# Altium PCB PCB1.PcbDoc
Units mm, origin at the board's own origin, x right, y up, seen from the top; angles counter-clockwise.
Board outline 150 x 80 mm, 2 copper layers (Top Layer, Bottom Layer); 32 components, 18 nets, 102 pads, 0 vias.
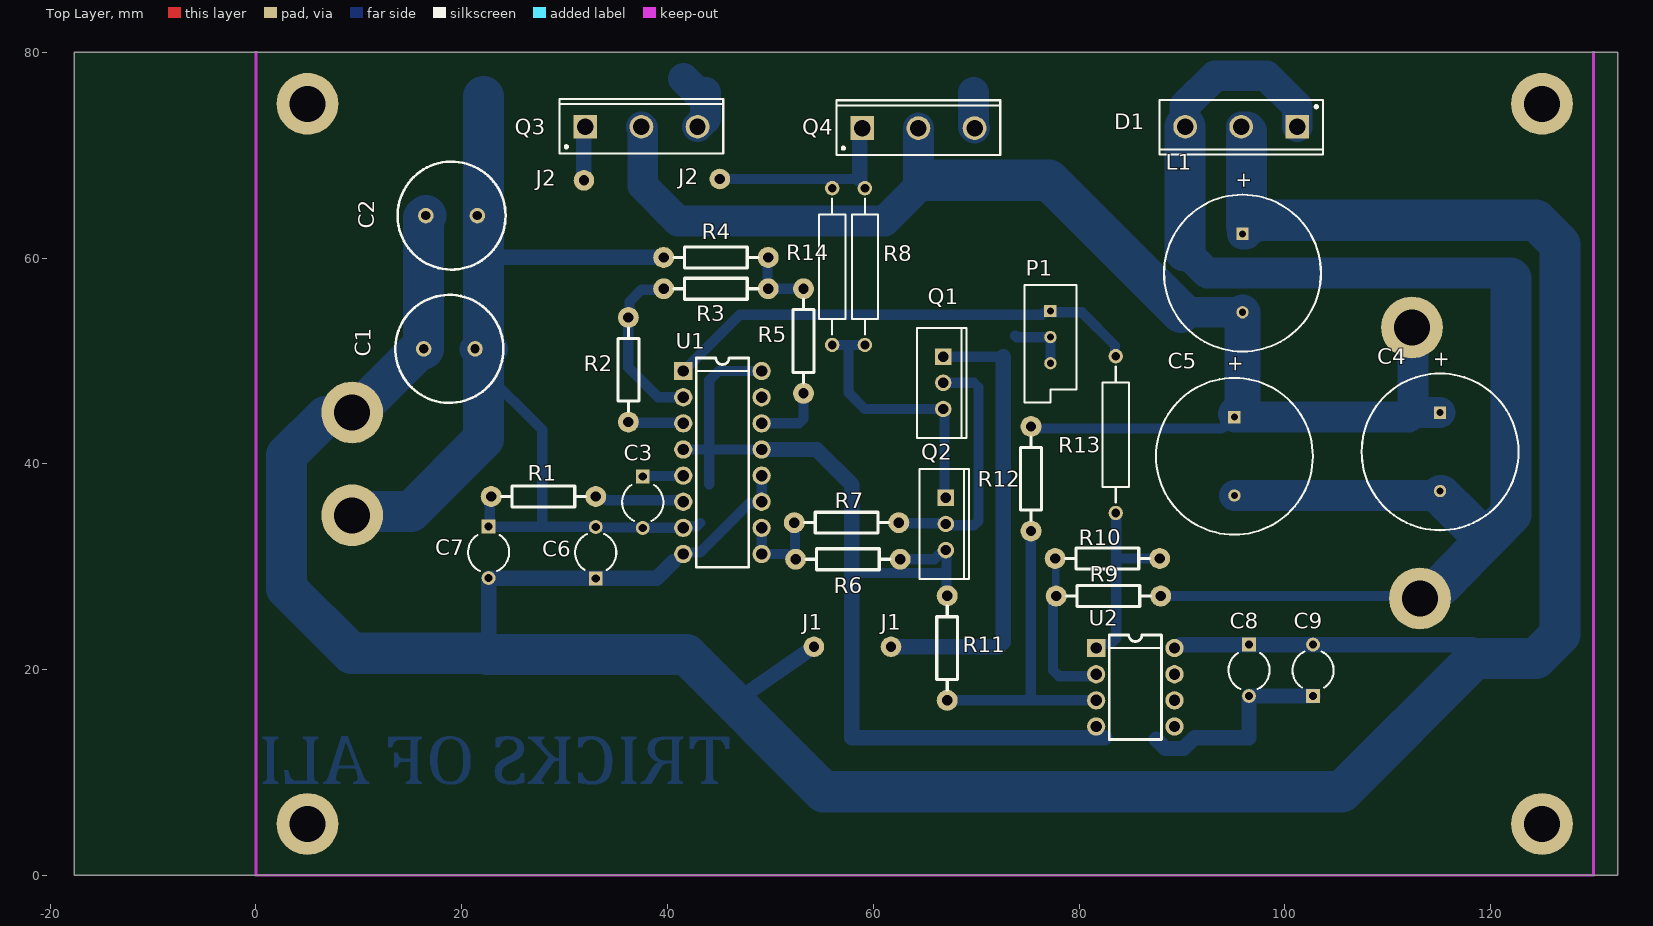
[diagram p0: Top Layer view]
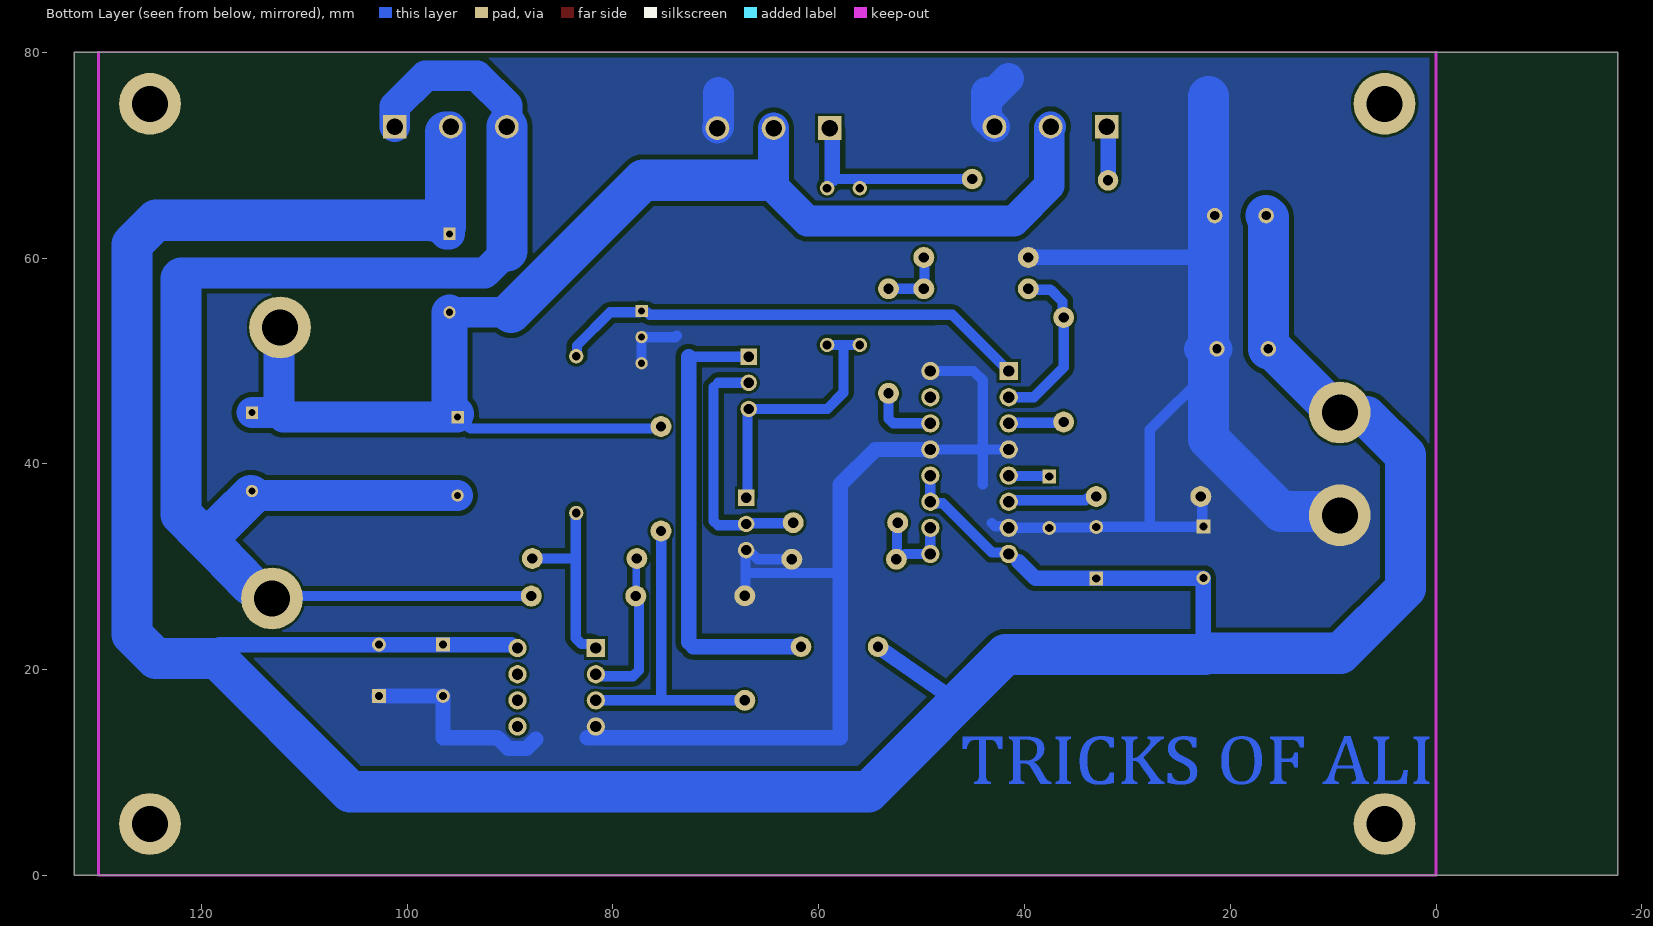
[diagram p1: Bottom Layer view, seen from below]

## Layer stack, top to bottom
Top Solder: solder mask 0.0102, Solder Resist, Dk 3.5
Top Layer: signal copper 0.0356
Dielectric 1: dielectric 0.32, FR-4, Dk 4.8
Bottom Layer: signal copper 0.0356
Bottom Solder: solder mask 0.0102, Solder Resist, Dk 3.5

## Board outline
-17.653,0 132.347,0 132.347,80 -17.653,80

## Design rules (kind name [scope] priority, off if disabled: settings)
Clearance [All] p1: gap=0.254 ignorepadtopadclearanceinfootprint=FALSE except(0: SMDPad-Hole THPad-Hole Via-Hole Fill-Hole Poly-Hole Region-Hole Text-Hole; 0.5: Arc-Arc Arc-Track Arc-SMDPad Arc-THPad Arc-Via Arc-Fill Arc-Poly Arc-Region Arc-Hole Track-Track Track-SMDPad Track-THPad Track-Via Track-Fill Track-Poly Track-Region Track-Hole; 1: Fill-GluePoints Poly-GluePoints Region-GluePoints)
DiffPairsRouting [All] p1: maxlimit=1 minlimit=0.5 mostfreqgap=0.5 toplayer_minwidth=0.25 toplayer_maxwidth=1 toplayer_prefwidth=0.5 bottomlayer_minwidth=0.25 bottomlayer_maxwidth=1 bottomlayer_prefwidth=0.5 maxuncoupledlength=12.7
PolygonConnect [All] p1: connectstyle=Direct reliefconductorwidth=0.254 reliefentries=4 polygonreliefangle="90 Angle" airgapwidth=0.5
RoomDefinition Sheet1 [InComponentClass('Sheet1')] p1: confinementstyle=ConfineOut formatcopy=TRUE lockcomponents=FALSE outline 324.993,126.365 330.073,126.365 330.073,129.286 324.993,129.286
RoutingLayers [All] p1: top layer_v5=FALSE bottom layer_v5=TRUE
RoutingPriority [InNetClass('power')] p1: routingpriority=100
RoutingVias [All] p1: holewidth=0.711 width=1.27 viastyle="Through Hole" minholewidth=0.711 minwidth=1.27 maxholewidth=0.711 maxwidth=1.27
SolderMaskExpansion [All] p1: expansion=0.102 istentingtop=FALSE
Width power [InNetClass('power')] p1: maxlimit=5 minlimit=0.75 preferedwidth=3
Width [All] p2: maxlimit=5 minlimit=0.75 preferedwidth=1
27 further rules are at their usual default settings.

## Components (designator, comment, footprint, x,y, rotation, side; value= is the part's Value field where it differs from the comment)
C1 "4700uF 16v" RB5-10.5 18.796,51.181 r0 top
C2 "4700uF 16v" RB5-10.5 19.01,64.135 r0 top
C3 "2.2nF" CAPR5-4X5 37.592,36.282 r270 top
C4 "4700uF 50V" RB7.6-15 115.087,41.173 r90 top
C5 "4700uF50v" RB7.6-15 95.098,40.742 r90 top
C6 "47uF" CAPR5-4X5 33.02,31.369 r90 top
C7 "100nF" CAPR5-4X5 22.606,31.409 r270 top
C8 "10uF" CAPR5-4X5 96.52,19.939 r270 top
C9 "100nF" CAPR5-4X5 102.743,19.939 r90 top
D1 "S30D45C" TO-247 95.758,72.771 r180 top
L1 "220uH" RB7.6-15 95.885,58.547 r90 top
P1 "10k" VR5 77.216,52.324 r270 top
Q1 "BD139" TO-220-AB 66.802,47.879 r270 top
Q2 "BD140" TO-220-AB 67.056,34.163 r270 top
Q3 "IRFP250" TO-247 37.465,72.771 r0 top
Q4 "IRFP250" TO-247 64.389,72.644 r0 top
R1 "4.7k" AXIAL0.4 33.02,36.83 r180 top
R2 "50K" AXIAL0.4 36.195,54.229 r270 top
R3 "560" AXIAL0.4 49.784,57.023 r180 top
R4 "10k" AXIAL0.4 49.784,60.071 r180 top
R5 "10k" AXIAL0.4 53.213,57.023 r270 top
R6 "2.2k" AXIAL0.4 52.451,30.734 r0 top
R7 "10" AXIAL0.4 52.324,34.29 r0 top
R8 "56 OHM 1W" AXIAL-0.6 59.182,59.182 r90 top
R9 "10k" AXIAL0.4 87.935,27.153 r180 top
R10 "2.2k" AXIAL0.4 77.673,30.81 r0 top
R11 "2.2k" AXIAL0.4 67.183,17.018 r90 top
R12 "10k" AXIAL0.4 75.336,43.637 r270 top
R13 "10k" AXIAL-0.6 83.566,42.85 r90 top
R14 "56 OHM 1W" AXIAL-0.6 56.007,59.182 r90 top
U1 "TL494" DIP16 41.529,49.022 r0 top
U2 "LM358" DIP8 81.661,22.098 r0 top

## Footprints (in the part's own frame and the unit in brackets; to place one, negate y for a bottom-side part, rotate by r counter-clockwise, add the part's x,y. Pads: shape width x height; smd on the part's side, far side on the other; paste and mask are expansions set on the pad)
AXIAL0.4 [mil]
  round 80 hole 39.37: 1(0,0) 2(400,0)
  silkscreen extent 40,-40 360,40
AXIAL-0.6 [mm] "Axial Device, Thru-Hole; 2 Leads; 0.6 in Pin Spacing"
  round 1.4 hole 0.85: 1(-7.62,0) 2(7.62,0)
  silkscreen extent -6.6,-1.27 6.6,1.27
CAPR5-4X5 [mm] "Capacitor; 2 Leads"
  rect 1.35x1.35 hole 0.8: 1(-2.5,0)
  round 1.35 hole 0.8: 2(2.5,0)
  silkscreen extent -1.69,-2 1.82,2
DIP8 [mil]
  rect 70x70 hole 43.31: 1(0,0)
  round 70 hole 43.31: 2(0,-100) 3(0,-200) 4(0,-300) 5(300,-300) 6(300,-200) 7(300,-100) 8(300,0)
  silkscreen extent 50,-350 250,50
DIP16 [mil]
  rect 70x70 hole 43.31: 1(0,0)
  round 70 hole 43.31: 2(0,-100) 3(0,-200) 4(0,-300) 5(0,-400) 6(0,-500) 7(0,-600) 8(0,-700) 9(300,-700) 10(300,-600) 11(300,-500) 12(300,-400) 13(300,-300) 14(300,-200) 15(300,-100) 16(300,0)
  silkscreen extent 50,-750 250,50
RB5-10.5 [mm] "Capacitor (Radial); 2 Leads"
  round 1.5 hole 0.9: 1(-2.5,0) 2(2.5,0)
  silkscreen extent -5.25,-5.25 5.25,5.25
RB7.6-15 [mm] "Polarized Capacitor (Radial); 2 Leads"
  rect 1.2x1.2 hole 0.7: 1(3.81,0)
  round 1.2 hole 0.7: 2(-3.81,0)
  silkscreen extent -7.62,-7.62 7.62,7.62
TO-220-AB [mm] "TO, Thru-Hole, Vertical, Heatsink Mounted; 3 In-Line Leads; Pitch 2.54 mm"
  rect 1.6x1.6 hole 1: 1(-2.54,0)
  round 1.6 hole 1: 2(0,0) 3(2.54,0)
  silkscreen extent -5.35,-2.55 5.35,2.25
TO-247 [mm] "SIP with Mounting Hole; 3 Leads; Body 20 x 15.6 x 5 mm (typ); Pitch 5.45 mm"
  rect 2.3x2.3 hole 1.6: 1(-5.45,0)
  round 2.3 hole 1.6: 2(0,0) 3(5.45,0)
  silkscreen extent -7.95,-2.6 7.95,2.7, body extent -7.95,-2.6 7.95,2.7, height 24.6
VR5 [mm] "Thru-Hole; 3 Leads"
  rect 1.2x1.2 hole 0.7: 1(-2.54,0)
  round 1.2 hole 0.7: 2(0,0) 3(2.54,0)
  silkscreen extent -5.08,-2.54 6.35,2.54

## Part data
C1 C2 C4 C5 C6 C8: library part "CAPACITOR POL"
C3 C7 C9: library part CAP
D1: library part DIODE-DUAL
L1: library part "INDUCTOR IRON"
P1: library part "RES VAR"
Q1: library part NPN3
Q2: library part PNP3
Q3 Q4: library part MOSFET-N1
R1 R2 R3 R4 R5 R6 R7 R8 R9 R10 R11 R12 R13 R14: library part RES

## Free pads (board coordinates)
  round 6 hole 3.5: G14(5,5) G14(5,75) G14(125,5) G14(125,75) ""(9.347,35) ""(9.347,45) ""(112.357,53.264) ""(113.132,26.924)
  round 2 hole 1: G18(31.877,67.564) G19(45.085,67.691) G20(61.722,22.225) G21(54.229,22.225)

## Nets (pads, with @x,y where several pads share a name; then routed paths per layer and width w, separated by ;. In a path a pad name is that pad's centre, name@x,y a point inside that pad or via, vN(x,y) a via of type N, cw(c..) or ccw(c..) an arc to the next point about the centre after c; other vN are vias at no path point)
+12: C1.1 C2.1 C6.1 C7.2 C8.1 C9.2 D1.2 L1.1 pad.@9.347,45 pad.G20 pad.G21 Q1.1 U1.8 U1.11 U1.12 U2.8 | length 386.2
  Bottom Layer w0.75: 22.509,21.463 22.606,21.56 ; C7.2 C7.2@22.626,28.889 ; C6.1@33,28.889 C6.1 ; 40.537,30.48 40.576,30.48 ; 72.205,22.225 72.644,22.664 ; U2.8 89.559,22.098 U2.8@89.9,22.439
  Bottom Layer w1: 40.576,30.48 41.475,31.379 43.14,31.379 47.933,36.173 49,36.173 U1.11 U1.12 ; Q1.1 72.644,50.419
  Bottom Layer w1.5: 22.606,21.56 C7.2 ; C7.2@22.626,28.889 C6.1@33,28.889 ; C6.1 38.926,28.869 40.537,30.48 ; 47.043,17.219 pad.G21 ; pad.G20 72.205,22.225 ; 72.644,22.664 72.644,50.419 ; U2.8@89.9,22.439 C8.1 118.252,22.439 119.609,21.082
  Bottom Layer w3: D1.2 D1.2@96.266,72.263 ; L1.1 96.236,62.357 97.506,63.627
  Bottom Layer w4: C2.1 16.296,63.921 C1.1 15.894,51.181 9.713,45 9.347,45 8.964,44.617 6.745,44.617 2.972,40.844 2.972,27.889 9.271,21.59 22.382,21.59 22.509,21.463 41.834,21.463 55.169,8.128 105.537,8.128 118.491,21.082 124.403,21.082 126.746,23.425 126.746,61.339 124.403,63.682 97.561,63.682 97.506,63.627 ; 96.266,63.089 D1.2@96.266,72.263
GND: C1.2 C2.2 C3.2 C6.2 C7.1 C8.2 C9.1 P1.2 P1.3 pad.@9.347,35 Q2.3 Q3.3 Q4.3 R1.2 R4.2 R6.2 R11.2 U1.4 U1.7 U1.13 U1.16 U2.4 | length 249.2
  Bottom Layer w0.75: 22.098,60.452 22.479,60.071 ; C7.1@22.626,33.889 C7.1 C7.1@22.733,34.036 ; R1.2@22.733,36.703 R1.2 ; C6.2@33,33.889 C6.2 C6.2@33.064,33.826 ; C3.2@37.548,33.826 C3.2 ; 57.912,13.402 58.132,13.402 ; 57.912,29.464 57.975,29.4 ; Q2.3@66.826,31.623 Q2.3 Q2.3@67.119,31.559 ; R11.2@67.119,27.241 R11.2 ; 81.534,13.402 81.534,14.351 U2.4 81.661,14.2 U2.4@81.996,13.864 ; 96.081,13.164 96.52,13.164
  Bottom Layer w1: 22.098,49.022 27.813,43.307 27.813,33.889 ; C7.1@22.626,33.889 27.813,33.889 ; C7.1@22.733,34.036 R1.2@22.733,36.703 ; C6.2@33,33.889 27.813,33.889 ; C6.2@33.064,33.826 C3.2@37.548,33.826 ; C3.2 U1.7 41.678,33.931 42.863,33.931 43.188,34.256 ; U1.4 44.069,41.402 ; 44.069,38.036 44.069,41.402 ; U1.13 44.069,41.402 ; U1.16 44.958,49.022 44.069,48.133 44.069,41.402 ; 57.975,29.4 67.119,29.4 ; R6.2 65.937,30.734 Q2.3@66.826,31.623 ; R11.2@67.119,27.241 67.119,29.4 ; Q2.3@67.119,31.559 67.119,29.4 ; 73.79,52.454 73.921,52.324 P1.2 P1.3
  Bottom Layer w1.5: 22.479,60.071 R4.2 ; U1.13 54.483,41.402 57.912,37.973 57.912,29.464 57.912,13.402 81.534,13.402 82.494,13.402 ; 87.506,13.228 88.395,12.339 90.167,12.339 91.23,13.402 96.52,13.402 C8.2 C9.1
  Bottom Layer w3: C1.2 22.973,51.181 ; 41.55,77.47 43.307,75.713 ; Q3.3 43.307,73.163 43.688,73.544 43.688,76.094 ; 69.723,76.094 69.723,72.76 Q4.3
  Bottom Layer w4: pad.@9.347,35 9.73,35.383 15.063,35.383 22.098,42.418 22.098,49.022 22.098,51.181 22.098,60.452 22.098,63.754 22.098,75.713
NetC3_1: C3.1 U1.5 | length 4
  Bottom Layer w0.75: C3.1 C3.1@37.632,38.822 ; U1.5@41.489,38.822 U1.5
  Bottom Layer w1: C3.1@37.632,38.822 U1.5@41.489,38.822
NetC4_1: C4.1 C5.1 L1.2 pad.@112.357,53.264 Q3.2 Q4.2 R12.1 | length 136.3
  Bottom Layer w1: R12.1@76.327,43.434 93.853,43.434 C5.1@95.25,44.831
  Bottom Layer w3: Q3.2 37.592,72.644 37.592,67.056 41.021,63.627 61.108,63.627 64.389,66.908 ; Q4.2 64.389,66.908 ; 65.045,67.564 64.389,66.908 ; 89.916,54.737 L1.2 ; C5.1 112.039,44.552 112.471,44.983 ; pad.@112.357,53.264 112.471,53.086 112.471,44.983 ; C4.1 112.471,44.983
  Bottom Layer w3.5: C5.1@95.25,44.831 95.885,45.466 L1.2
  Bottom Layer w4: 65.045,67.564 77.075,67.564 89.902,54.737 89.916,54.737
NetC4_2: C4.2 C5.2 D1.1 D1.3 pad.@113.132,26.924 R9.1 | length 159.9
  Bottom Layer w1: R9.1 113.995,27.153 113.995,28.918 117.526,32.448 117.526,34.925 C4.2
  Bottom Layer w3: 90.308,60.695 92.456,58.547 121.412,58.547 121.92,58.039 ; D1.3 90.308,74.824 93.208,77.724 98.219,77.724 101.208,74.735 D1.1 ; C5.2 C4.2@115.189,36.932
  Bottom Layer w4: 90.308,60.695 D1.3 ; pad.@115.189,28.194 118.462,31.529 119.819,32.911 ; C4.2@115.189,36.932 117.361,34.76 119.21,32.911 119.819,32.911 ; 121.92,58.039 121.967,57.992 121.967,35.099 119.819,32.911
NetP1_1: P1.1 R13.2 U1.1 | length 46.6
  Bottom Layer w1: U1.1 47.015,54.508 48.74,54.508 48.742,54.507 76.427,54.507 76.684,54.764 77.116,54.764 P1.1 ; P1.1@77.43,54.737 80.264,54.737 83.489,51.512 83.489,50.546 R13.2
NetQ1_2: Q1.2 Q2.2 R7.2 | length 24.6
  Bottom Layer w0.75: R7.2 R7.2@62.547,34.227 ; Q2.2@66.992,34.227 Q2.2 Q2.2@67.183,34.036 ; 69.792,47.879 70.231,47.44
  Bottom Layer w1: R7.2@62.547,34.227 Q2.2@66.992,34.227 ; Q1.2 69.792,47.879 ; Q2.2@67.183,34.036 69.792,34.036 70.231,34.475 70.231,47.44
NetQ1_3: Q1.3 Q2.1 R8.1 R14.1 | length 26.4
  Bottom Layer w0.75: Q1.3 Q1.3@66.929,45.212 ; Q2.1@66.929,36.83 Q2.1
  Bottom Layer w1: R14.1 57.594,51.562 ; R8.1 57.594,51.562 ; Q1.3 59.182,45.339 57.594,46.926 57.594,51.562 ; Q2.1@66.929,36.83 Q1.3@66.929,45.212
NetQ3_1: pad.G18 pad.G19 Q3.1 Q4.1 R8.2 R14.2 | length 25.9
  Bottom Layer w0.75: Q3.1@31.877,72.633 Q3.1 ; R14.2 56.007,67.691 ; 58.674,67.486 58.674,67.691 ; Q4.1@58.674,72.379 Q4.1 ; R8.2 R8.2@59.182,66.978
  Bottom Layer w1: pad.G19 56.007,67.691 58.674,67.691 ; 58.674,67.486 R8.2@59.182,66.978
  Bottom Layer w1.5: pad.G18 Q3.1@31.877,72.633 ; 58.674,67.691 Q4.1@58.674,72.379
NetR1_1: R1.1 U1.6 | length 8.7
  Bottom Layer w1: R1.1 33.217,36.633 33.947,36.633 34.105,36.474 40.826,36.474 40.83,36.471 41.38,36.471 U1.6
NetR2_1: R2.1 R3.2 U1.2 | length 16.8
  Bottom Layer w0.75: R2.1 R2.1@36.302,54.336 ; R3.2@39.515,56.914 R3.2
  Bottom Layer w1: R2.1@36.175,54.229 36.175,49.403 39.096,46.482 U1.2 ; R2.1@36.302,54.336 36.302,55.753 37.463,56.914 R3.2@39.515,56.914
NetR2_2: R2.2 U1.3 | length 5.4
  Bottom Layer w0.75: R2.2 R2.2@36.258,44.005 ; U1.3@41.465,44.005 U1.3
  Bottom Layer w1: R2.2@36.258,44.005 U1.3@41.465,44.005
NetR3_1: R3.1 R4.1 R5.1 | length 6.3
  Bottom Layer w0.75: R3.1@49.72,57.087 R3.1 ; R4.1 R4.1@49.847,60.134
  Bottom Layer w1: R3.1@49.72,57.087 R4.1@49.72,59.753 ; R3.1 R5.1
NetR5_2: R5.2 U1.14 | length 6.7
  Bottom Layer w1: U1.14 52.774,43.942 53.213,44.381 R5.2
NetR6_1: R6.1 R7.1 U1.9 U1.10 | length 9.7
  Bottom Layer w0.75: R6.1@52.104,30.734 R6.1 R6.1@52.387,30.797 ; R7.1 R7.1@52.387,34.227
  Bottom Layer w1: U1.10 U1.9 51.596,31.242 R6.1@52.104,30.734 ; R6.1@52.387,30.797 R7.1@52.387,34.227
NetR9_2: R9.2 R10.1 U2.2 | length 15.5
  Bottom Layer w0.75: R10.1 77.724,30.759 77.724,27.203 R9.2
  Bottom Layer w1: R9.2@77.47,27.216 77.47,19.947 78.056,19.361 80.914,19.361 80.962,19.409 81.512,19.409 U2.2
NetR10_2: R10.2 R13.1 U2.1 | length 18.8
  Bottom Layer w0.75: U2.1 U2.1@81.788,21.971
  Bottom Layer w1: U2.1@81.788,21.971 81.788,22.225 82.05,22.487 83.031,22.487 83.617,23.073 R13.1@83.617,35.334 ; 83.922,30.81 R10.2
NetR11_1: R11.1 R12.2 U2.3 | length 30.4
  Bottom Layer w1: R11.1 75.311,17.018 ; R12.2@75.311,32.918 75.311,17.018 ; U2.3 75.311,17.018
pads on no net: U1.15 U2.5 U2.6 U2.7

## Polygon pours and split planes (outlines as drawn)
GND on Bottom Layer "GND_L02_P000" (solid, remove dead copper, pour order 0): 0,80.01 130.048,80.01 130.048,0 0,0

## Keep-outs
Keep-Out Layer:
  lines w0: 0,0 130,0 ; 0,80 130,80
  lines w0.254: 0,80 0,0 130,0 130,80

## Other copper
Bottom Layer:
  drawing of 11 lines, arcs and shapes, not listed

## Silkscreen, mask and mechanical layers (free items; w line width, h text height)
Top Overlay:
  text "J2" at 41.021,67.183 h1.52
  text "J2" at 27.178,67.056 h1.52
  text "J1" at 53.086,23.876 h1.52
  text "J1" at 60.706,23.876 h1.52

## Text inside footprints (layer, text, board x,y; h text height)
C4: Top Overlay "+" at 115.824,49.305 h1.5 r90
C5: Top Overlay "+" at 95.834,48.873 h1.5 r90
L1: Top Overlay "+" at 96.622,66.679 h1.5 r90